# EAGLE board Power_section_v1 (EAGLE 7.3.0)
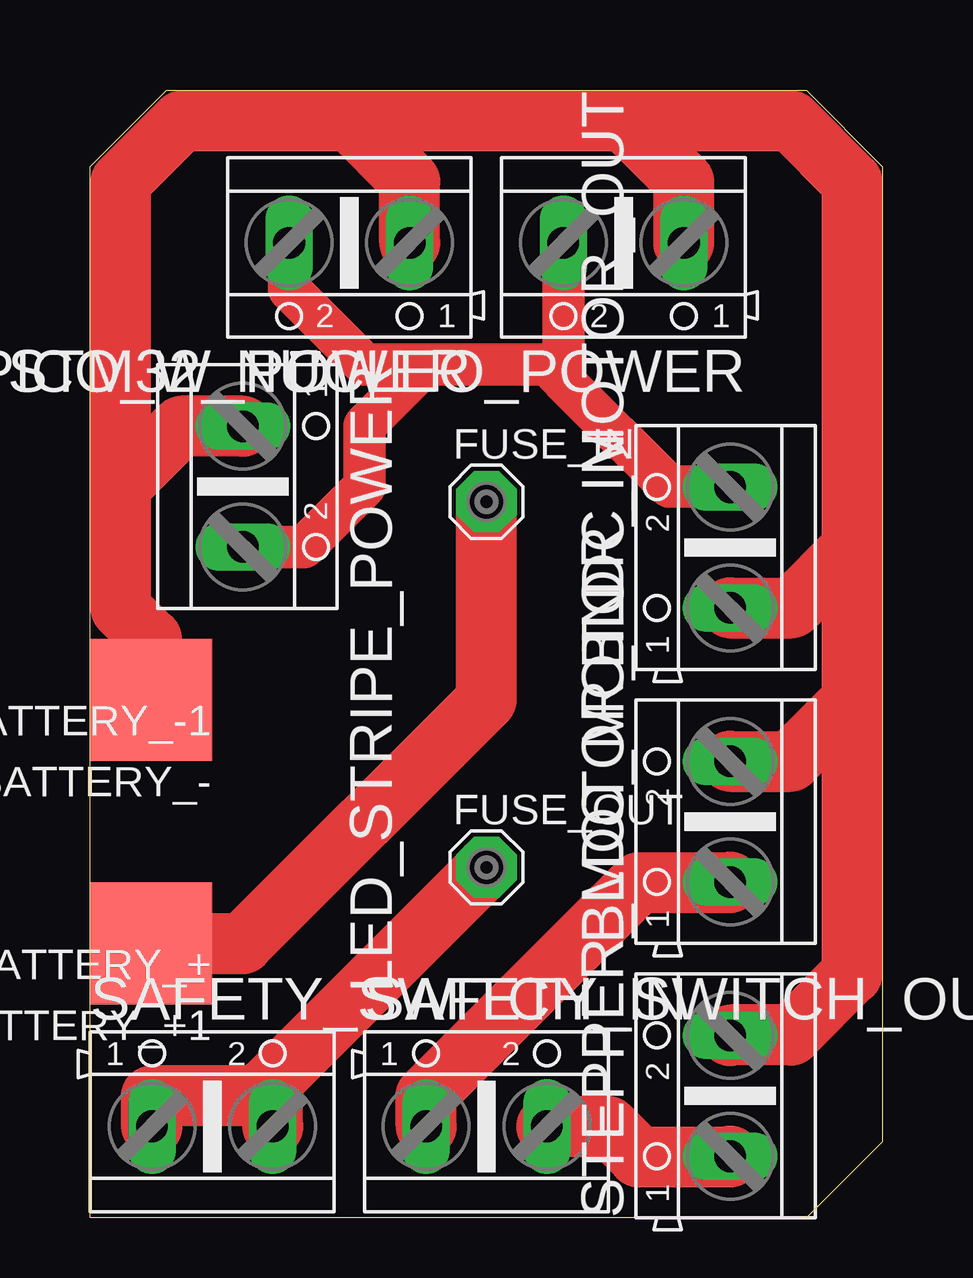
[diagram p0: board, top side]

Size 33.02 x 46.99 mm. Coordinates in mm from the lower left corner, seen from the top.
Outline: 0,0 0,43.81 3.17,46.99 29.84,46.99 33.02,43.81 33.02,3.17 29.84,0 0,0
Copper layers (1*16): Top 0.035mm / dielectric 1.5mm / Bottom 0.035mm
Design rules "default": minimum track width 10mil, minimum drill 24mil, track to track 8mil, track to pad 8mil, pad to pad 8mil, via to via 8mil, smd to smd 8mil, copper to edge 40mil, drill to drill 8mil, minimum pad ring 10mil, minimum via ring 8mil, stop-mask expansion 4mil, vias tented up to drill 0mil, thermal gap 10mil

## Footprints (pad centres in the part's own frame; a part is rotated, then mirrored left to right if it is on the bottom)
SMD2,54-5,08 = smd 2.54 x 5.08: 1 0,0
AK500/2 = drill 1.321 long: 1 -2.515,0; 2 2.515,0
SE14 = drill 1.397 pad 2.54 octagon: MP 0,0

## Placement (x,y rotation side)
BATTERY_+  WIREPADSMD2,54-5,08  [SMD2,54-5,08]  2.54,12.7 90 top
BATTERY_+1  WIREPADSMD2,54-5,08  [SMD2,54-5,08]  2.54,10.16 90 top
BATTERY_-  WIREPADSMD2,54-5,08  [SMD2,54-5,08]  2.54,20.32 90 top
BATTERY_-1  WIREPADSMD2,54-5,08  [SMD2,54-5,08]  2.54,22.86 90 top
BLDC_MOTOR_IN  [AK500/2]  26.67,16.51 90 top
BLDC_MOTOR_OUT  [AK500/2]  26.67,27.94 90 top
FUSE_IN  SE14  [SE14]  16.51,29.84 0 top
FUSE_OUT  SE14  [SE14]  16.51,14.61 0 top
LED_STRIPE_POWER  [AK500/2]  6.35,30.48 270 top
RPI_PICO_W_POWER  [AK500/2]  10.79,40.64 180 top
SAFETY_SWITCH_IN  [AK500/2]  5.08,3.81 0 top
SAFETY_SWITCH_OUT  [AK500/2]  16.51,3.81 0 top
STEPPER_MOTOR_IN  [AK500/2]  26.67,5.08 90 top
STM32_NUCLEO_POWER  [AK500/2]  22.23,40.64 180 top

## Library data of the parts
BATTERY_+ BATTERY_+1 BATTERY_- BATTERY_-1 = wirepad
BLDC_MOTOR_IN BLDC_MOTOR_OUT LED_STRIPE_POWER RPI_PICO_W_POWER SAFETY_SWITCH_IN SAFETY_SWITCH_OUT STEPPER_MOTOR_IN STM32_NUCLEO_POWER = con-ptr500; OC_FARNELL: unknown; OC_NEWARK: unknown
FUSE_IN FUSE_OUT = solpad

## Nets
5V: BLDC_MOTOR_OUT.2 LED_STRIPE_POWER.2 RPI_PICO_W_POWER.2 STM32_NUCLEO_POWER.2
12V: FUSE_OUT.MP SAFETY_SWITCH_IN.1 SAFETY_SWITCH_IN.2
BLDC_MOTOR: BLDC_MOTOR_IN.1 SAFETY_SWITCH_OUT.1
GND: BATTERY_-1.1 BATTERY_-.1 BLDC_MOTOR_IN.2 BLDC_MOTOR_OUT.1 LED_STRIPE_POWER.1 RPI_PICO_W_POWER.1 STEPPER_MOTOR_IN.2 STM32_NUCLEO_POWER.1
N$1: BATTERY_+1.1 BATTERY_+.1 FUSE_IN.MP
STEPPER_MOTOR: SAFETY_SWITCH_OUT.2 STEPPER_MOTOR_IN.1

## Tracks (layer width: path | path; a pad name or v marks a point on that pad's centre or on a via)
5V
  Top 1.778: LED_STRIPE_POWER.2 8.91,27.96 11.43,30.48 11.43,33.02 13.97,35.56 | 13.97,35.56 19.05,35.56 19.68,34.92 | 19.68,34.92 24.13,30.48 26.64,30.48 BLDC_MOTOR_OUT.2 | RPI_PICO_W_POWER.2 8.28,38.71 11.43,35.56 13.97,35.56 | STM32_NUCLEO_POWER.2 19.71,34.95 19.68,34.92
12V
  Top 2.54: FUSE_OUT.MP 7.3,5.4 | 7.3,5.4 6.99,5.08 2.54,5.08 2.54,3.83 SAFETY_SWITCH_IN.1 | SAFETY_SWITCH_IN.2 7.59,5.11 7.3,5.4
BLDC_MOTOR
  Top 2.54: SAFETY_SWITCH_OUT.1 13.99,5.05 13.97,5.08 22.86,13.97 23.5,13.97 24.13,13.97 26.64,13.97 BLDC_MOTOR_IN.1
GND
  Top 2.54: BATTERY_-.1 BATTERY_-1.1 2.54,24.13 1.27,25.4 1.27,30.48 | 1.27,30.48 1.27,43.18 3.81,45.72 10.79,45.72 | 10.79,45.72 22.23,45.72 | 22.23,45.72 29.21,45.72 31.75,43.18 31.75,27.94 | 31.75,27.94 31.75,21.59 | 31.75,21.59 31.75,10.16 29.21,7.62 26.7,7.62 STEPPER_MOTOR_IN.2 | BLDC_MOTOR_IN.2 29.18,19.02 31.75,21.59 | BLDC_MOTOR_OUT.1 29.23,25.43 31.75,27.94 | STM32_NUCLEO_POWER.1 24.74,43.2 22.23,45.72 | RPI_PICO_W_POWER.1 13.31,43.2 10.79,45.72 | LED_STRIPE_POWER.1 3.79,32.99 1.27,30.48
N$1
  Top 2.54: FUSE_IN.MP 16.51,21.59 6.35,11.43 3.81,11.43 BATTERY_+.1 BATTERY_+1.1
STEPPER_MOTOR
  Top 2.54: SAFETY_SWITCH_OUT.2 21.59,3.81 22.86,2.54 26.64,2.54 STEPPER_MOTOR_IN.1